# Allegro board 8880F5-0822_6.brd
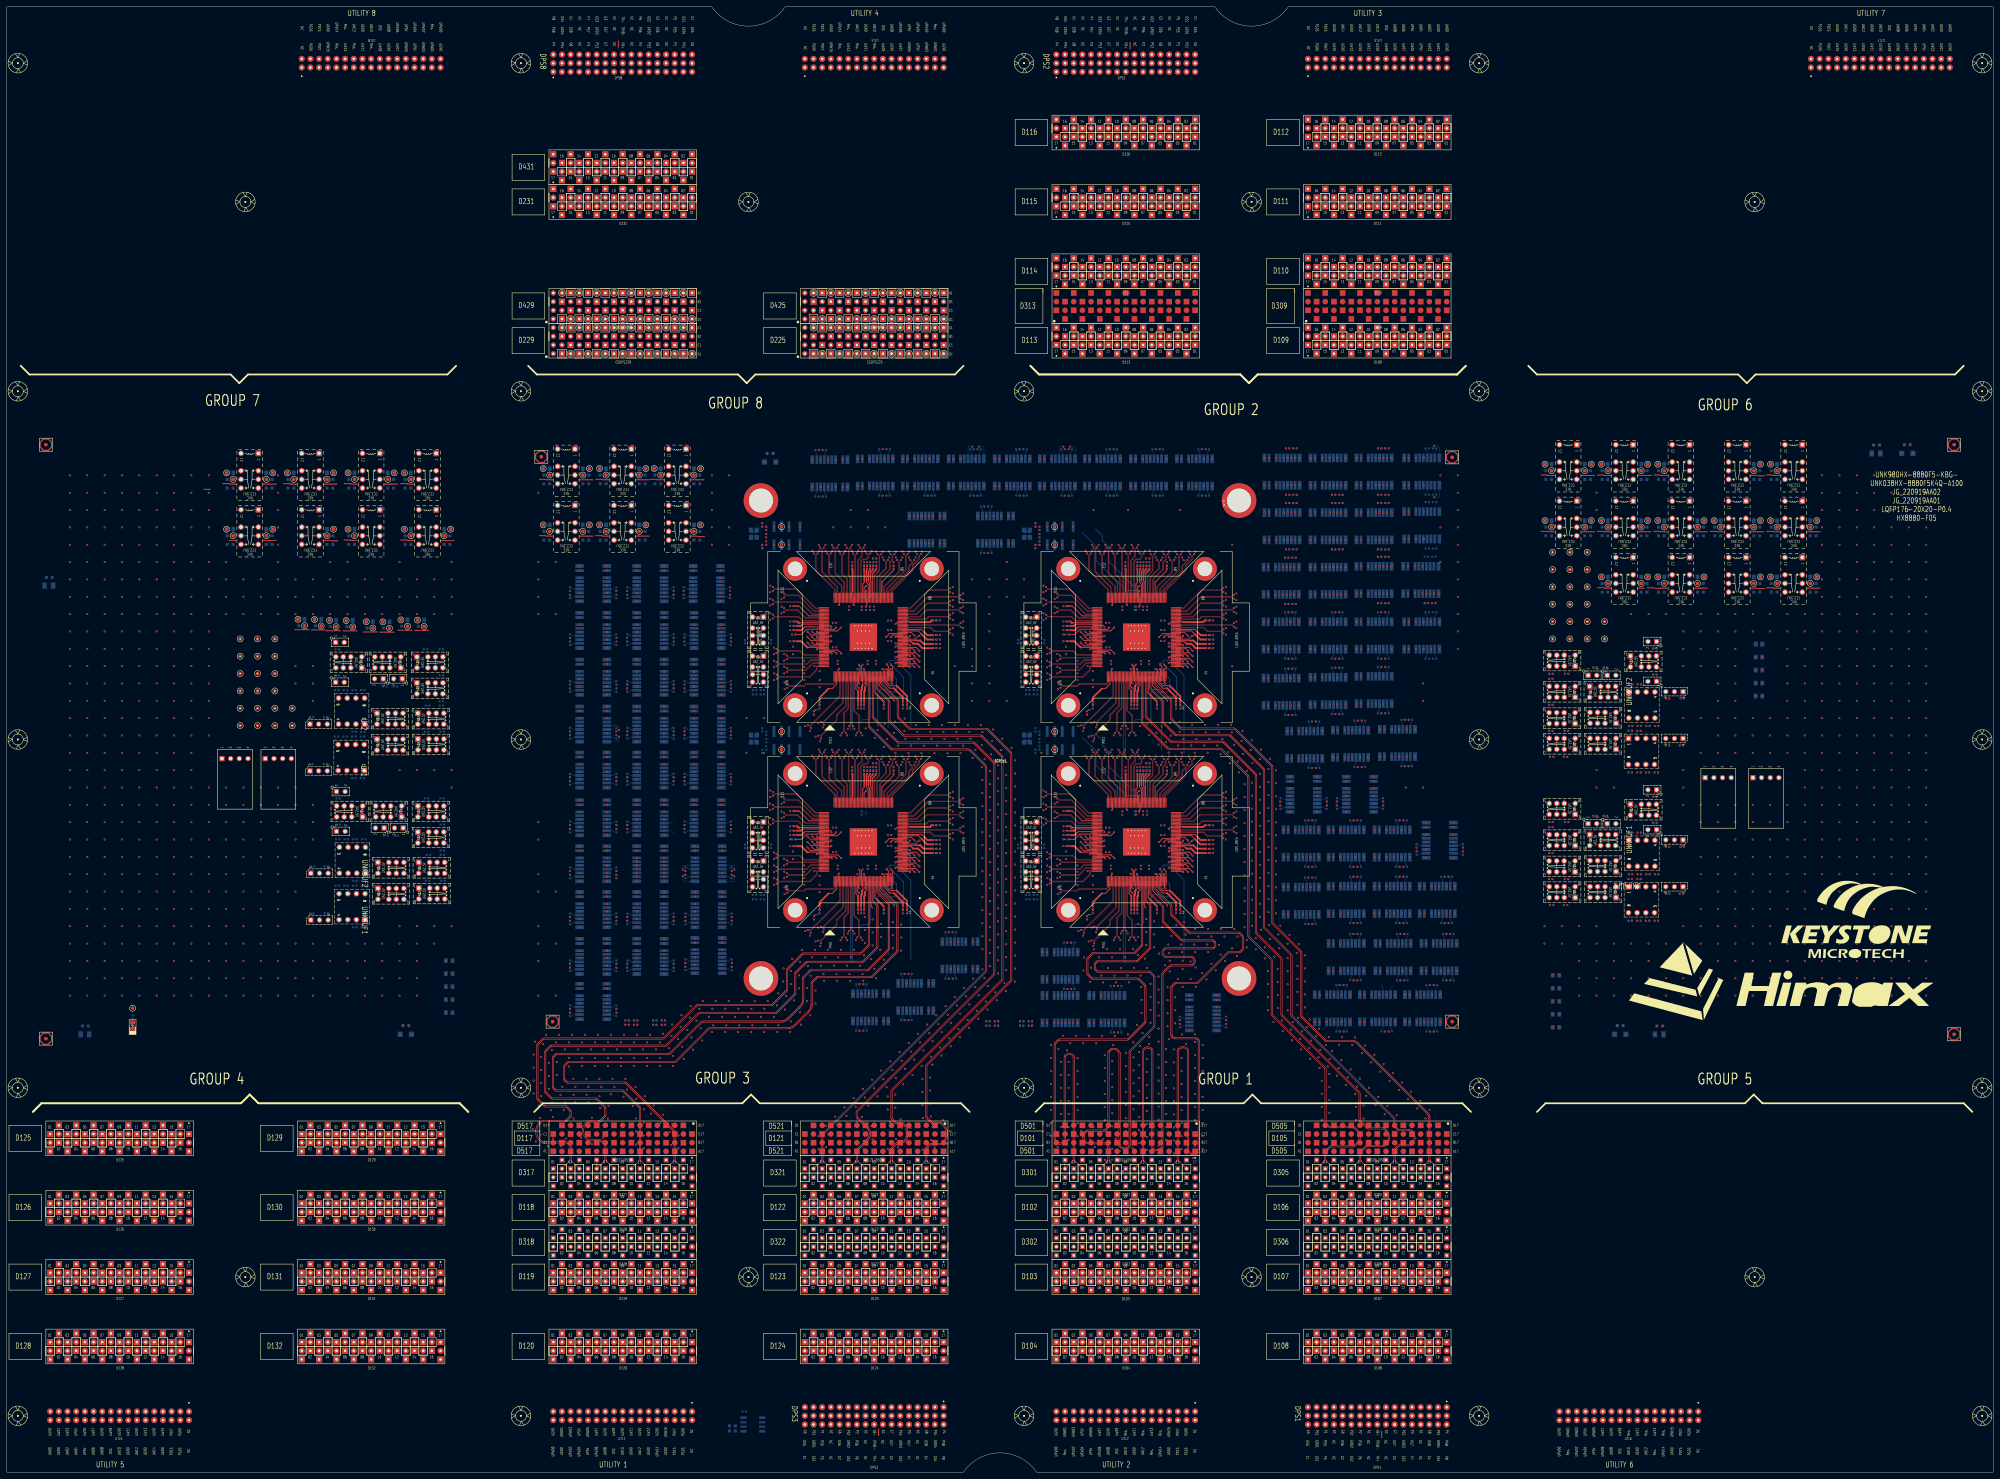
[diagram p0: board, top side]
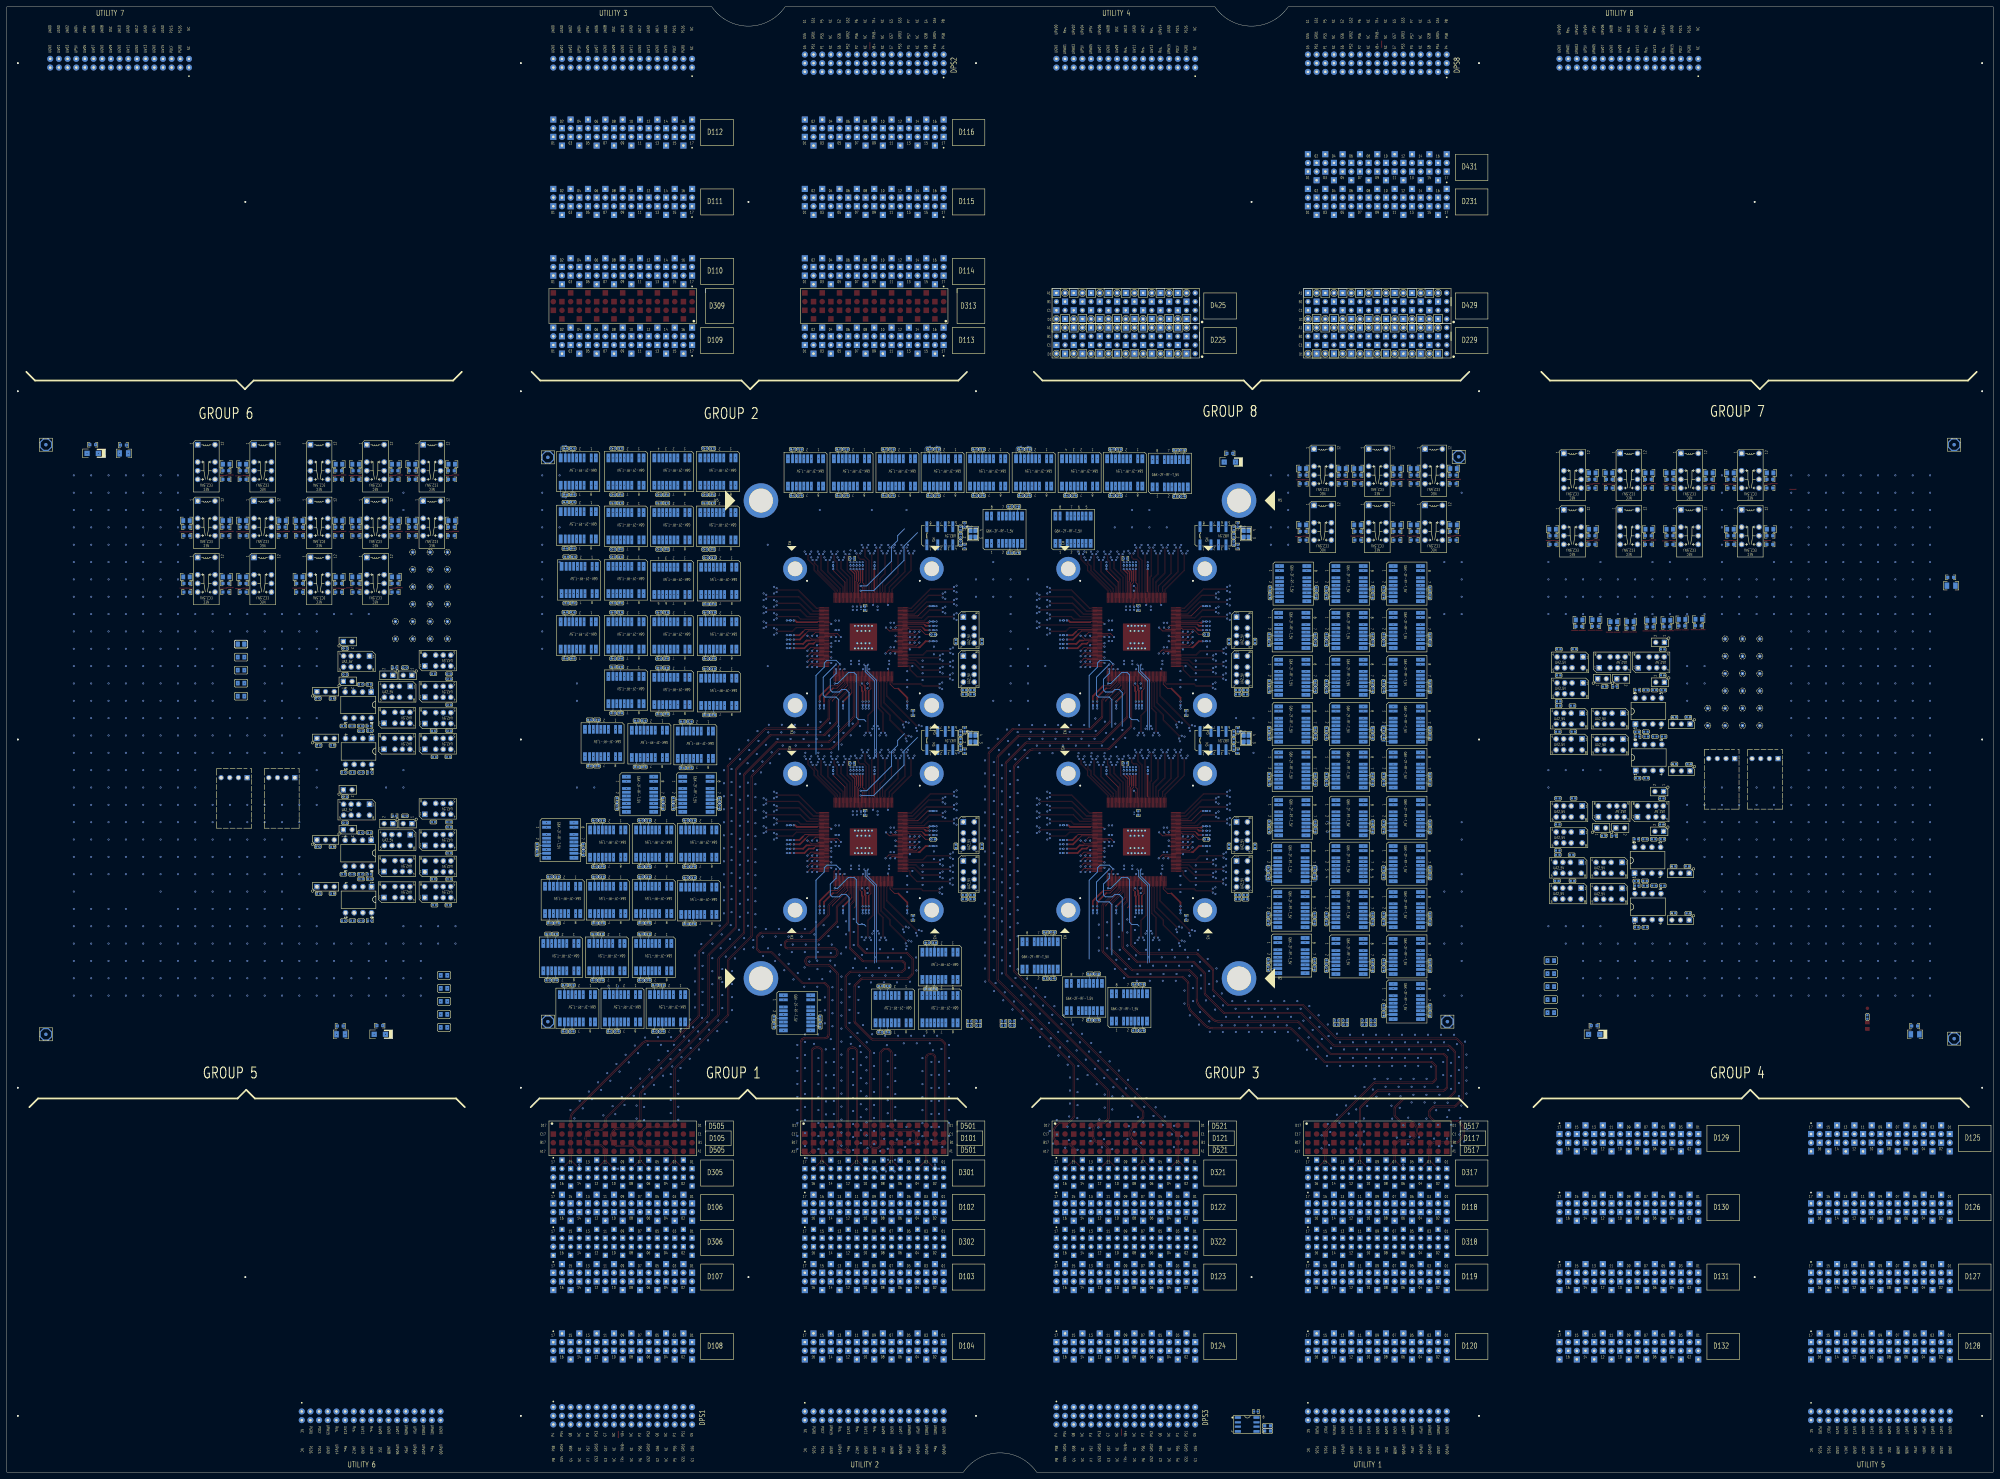
[diagram p1: board, bottom side, seen from below]

Outline 581.66 x 429.26 mm; copper layers: TOP, L02_DGND, L03_SIGNAL, L04_DGND, L05_SIGNAL, L06_DGND, L07_SIGNAL, L08_DGND, L09_SIGNAL, L10_DGND, L11_POWER, L12_DGND, L13_POWER, L14_DGND, L15_POWER, L16_DGND, L17_5V, L18_CBIT, L19_DGND, L20_POWER, L21_DGND, L22_POWER, L23_DGND, L24_POWER, L25_DGND, L26_SIGNAL, L27_DGND, L28_SIGNAL, L29_DGND, L30_SIGNAL, L31_DGND, L32_SIGNAL, L33_DGND, BOTTOM. Coordinates in mm from the lower left corner of the outline.

## Design rules (mm)
net group DIFFPAIR0: nets S1_2TX_100DCH007+ S1_2TX_100DCH007-
net group DIFFPAIR1: nets S1_2TX_100DCH006+ S1_2TX_100DCH006-
net group DIFFPAIR2: nets S1_2TX_100DCH005+ S1_2TX_100DCH005-
net group DIFFPAIR3: nets S1_2TX_100DCH004+ S1_2TX_100DCH004-
net group DIFFPAIR4: nets S1_2TX_100DCH003+ S1_2TX_100DCH003-
net group DIFFPAIR5: nets S1_2TX_100DCH002+ S1_2TX_100DCH002-
net group DIFFPAIR6: nets S1_2TX_100DCH001+ S1_2TX_100DCH001-
net group DIFFPAIR71: nets S1_4TX_100DCH003+ S1_4TX_100DCH003-
net group DIFFPAIR72: nets S1_4TX_100DCH004+ S1_4TX_100DCH004-
net group DIFFPAIR73: nets S1_4TX_100DCH005+ S1_4TX_100DCH005-
net group DIFFPAIR74: nets S1_4TX_100DCH006+ S1_4TX_100DCH006-
net group DIFFPAIR75: nets S1_4TX_100DCH007+ S1_4TX_100DCH007-
net group DIFFPAIR76: nets S1_ISP14+ S1_ISP14-
net group DIFFPAIR77: nets S1_3TX_100DCH002+ S1_3TX_100DCH002-
net group DIFFPAIR78: nets S1_3TX_100DCH003+ S1_3TX_100DCH003-
net group DIFFPAIR79: nets S1_3TX_100DCH004+ S1_3TX_100DCH004-
net group DIFFPAIR80: nets S1_3TX_100DCH005+ S1_3TX_100DCH005-
net group DIFFPAIR81: nets S1_3TX_100DCH006+ S1_3TX_100DCH006-
net group DIFFPAIR82: nets S1_3TX_100DCH007+ S1_3TX_100DCH007-
net group DIFFPAIR83: nets S1_4TX_100DCH001+ S1_4TX_100DCH001-
net group DIFFPAIR84: nets S1_4TX_100DCH002+ S1_4TX_100DCH002-
net group DIFFPAIR85: nets S1_1TX_100DCH007+ S1_1TX_100DCH007-
net group DIFFPAIR86: nets S1_1TX_100DCH006+ S1_1TX_100DCH006-
net group DIFFPAIR87: nets S1_1TX_100DCH005+ S1_1TX_100DCH005-
net group DIFFPAIR88: nets S1_1TX_100DCH004+ S1_1TX_100DCH004-
net group DIFFPAIR89: nets S1_1TX_100DCH003+ S1_1TX_100DCH003-
net group DIFFPAIR90: nets S1_1TX_100DCH002+ S1_1TX_100DCH002-
net group DIFFPAIR91: nets S1_ISP00+ S1_ISP00-
net group DIFFPAIR92: nets S2_4TX_100DCH003+ S2_4TX_100DCH003-
net group DIFFPAIR93: nets S2_4TX_100DCH004+ S2_4TX_100DCH004-
net group DIFFPAIR94: nets S2_4TX_100DCH005+ S2_4TX_100DCH005-
net group DIFFPAIR95: nets S2_4TX_100DCH006+ S2_4TX_100DCH006-
net group DIFFPAIR96: nets S2_4TX_100DCH007+ S2_4TX_100DCH007-
net group DIFFPAIR97: nets S2_4TX_100DCH002+ S2_4TX_100DCH002-
net group DIFFPAIR98: nets S2_4TX_100DCH001+ S2_4TX_100DCH001-
net group DIFFPAIR99: nets S2_3TX_100DCH007+ S2_3TX_100DCH007-
net group DIFFPAIR100: nets S2_3TX_100DCH006+ S2_3TX_100DCH006-
net group DIFFPAIR101: nets S2_3TX_100DCH005+ S2_3TX_100DCH005-
net group DIFFPAIR102: nets S2_3TX_100DCH004+ S2_3TX_100DCH004-
net group DIFFPAIR103: nets S2_3TX_100DCH003+ S2_3TX_100DCH003-
net group DIFFPAIR104: nets S2_3TX_100DCH002+ S2_3TX_100DCH002-
net group DIFFPAIR105: nets S2_ISP14+ S2_ISP14-
net group DIFFPAIR106: nets S2_2TX_100DCH007+ S2_2TX_100DCH007-
net group DIFFPAIR107: nets S2_2TX_100DCH006+ S2_2TX_100DCH006-
net group DIFFPAIR108: nets S2_2TX_100DCH005+ S2_2TX_100DCH005-
net group DIFFPAIR109: nets S2_2TX_100DCH004+ S2_2TX_100DCH004-
net group DIFFPAIR110: nets S2_2TX_100DCH003+ S2_2TX_100DCH003-
net group DIFFPAIR111: nets S2_2TX_100DCH002+ S2_2TX_100DCH002-
net group DIFFPAIR112: nets S2_2TX_100DCH001+ S2_2TX_100DCH001-
net group DIFFPAIR113: nets S2_1TX_100DCH007+ S2_1TX_100DCH007-
net group DIFFPAIR114: nets S2_1TX_100DCH006+ S2_1TX_100DCH006-
net group DIFFPAIR115: nets S2_1TX_100DCH005+ S2_1TX_100DCH005-
net group DIFFPAIR116: nets S2_1TX_100DCH004+ S2_1TX_100DCH004-
net group DIFFPAIR117: nets S2_1TX_100DCH003+ S2_1TX_100DCH003-
net group DIFFPAIR118: nets S2_1TX_100DCH002+ S2_1TX_100DCH002-
net group DIFFPAIR119: nets S2_ISP00+ S2_ISP00-
net group DIFFPAIR120: nets S4_4TX_100DCH007+ S4_4TX_100DCH007-
net group DIFFPAIR121: nets S4_4TX_100DCH006+ S4_4TX_100DCH006-
net group DIFFPAIR122: nets S4_4TX_100DCH005+ S4_4TX_100DCH005-
net group DIFFPAIR123: nets S4_4TX_100DCH004+ S4_4TX_100DCH004-
net group DIFFPAIR124: nets S4_4TX_100DCH003+ S4_4TX_100DCH003-
net group DIFFPAIR125: nets S4_4TX_100DCH002+ S4_4TX_100DCH002-
net group DIFFPAIR126: nets S4_4TX_100DCH001+ S4_4TX_100DCH001-
net group DIFFPAIR127: nets S4_3TX_100DCH007+ S4_3TX_100DCH007-
net group DIFFPAIR128: nets S4_3TX_100DCH006+ S4_3TX_100DCH006-
net group DIFFPAIR129: nets S4_3TX_100DCH005+ S4_3TX_100DCH005-
net group DIFFPAIR130: nets S4_3TX_100DCH004+ S4_3TX_100DCH004-
net group DIFFPAIR131: nets S4_3TX_100DCH003+ S4_3TX_100DCH003-
net group DIFFPAIR132: nets S4_3TX_100DCH002+ S4_3TX_100DCH002-
net group DIFFPAIR133: nets S4_ISP14+ S4_ISP14-
net group DIFFPAIR134: nets S4_2TX_100DCH007+ S4_2TX_100DCH007-
net group DIFFPAIR135: nets S4_2TX_100DCH006+ S4_2TX_100DCH006-
net group DIFFPAIR136: nets S4_2TX_100DCH005+ S4_2TX_100DCH005-
net group DIFFPAIR137: nets S4_2TX_100DCH004+ S4_2TX_100DCH004-
net group DIFFPAIR138: nets S4_2TX_100DCH003+ S4_2TX_100DCH003-
net group DIFFPAIR139: nets S4_2TX_100DCH002+ S4_2TX_100DCH002-
net group DIFFPAIR140: nets S4_2TX_100DCH001+ S4_2TX_100DCH001-
net group DIFFPAIR141: nets S4_1TX_100DCH007+ S4_1TX_100DCH007-
net group DIFFPAIR142: nets S4_1TX_100DCH006+ S4_1TX_100DCH006-
net group DIFFPAIR143: nets S4_1TX_100DCH005+ S4_1TX_100DCH005-
net group DIFFPAIR144: nets S4_1TX_100DCH004+ S4_1TX_100DCH004-
net group DIFFPAIR145: nets S4_1TX_100DCH003+ S4_1TX_100DCH003-
net group DIFFPAIR146: nets S4_1TX_100DCH002+ S4_1TX_100DCH002-
net group DIFFPAIR147: nets S4_ISP00+ S4_ISP00-
net group DIFFPAIR148: nets S3_4TX_100DCH007+ S3_4TX_100DCH007-
net group DIFFPAIR149: nets S3_4TX_100DCH006+ S3_4TX_100DCH006-
net group DIFFPAIR150: nets S3_4TX_100DCH005+ S3_4TX_100DCH005-
net group DIFFPAIR151: nets S3_4TX_100DCH004+ S3_4TX_100DCH004-
net group DIFFPAIR152: nets S3_4TX_100DCH003+ S3_4TX_100DCH003-
net group DIFFPAIR153: nets S3_4TX_100DCH002+ S3_4TX_100DCH002-
net group DIFFPAIR154: nets S3_4TX_100DCH001+ S3_4TX_100DCH001-
net group DIFFPAIR155: nets S3_3TX_100DCH007+ S3_3TX_100DCH007-
net group DIFFPAIR156: nets S3_3TX_100DCH006+ S3_3TX_100DCH006-
net group DIFFPAIR157: nets S3_3TX_100DCH005+ S3_3TX_100DCH005-
net group DIFFPAIR158: nets S3_3TX_100DCH004+ S3_3TX_100DCH004-
net group DIFFPAIR159: nets S3_3TX_100DCH003+ S3_3TX_100DCH003-
net group DIFFPAIR160: nets S3_3TX_100DCH002+ S3_3TX_100DCH002-
net group DIFFPAIR161: nets S3_ISP14+ S3_ISP14-
net group DIFFPAIR162: nets S3_2TX_100DCH007+ S3_2TX_100DCH007-
net group DIFFPAIR163: nets S3_2TX_100DCH006+ S3_2TX_100DCH006-
net group DIFFPAIR164: nets S3_2TX_100DCH005+ S3_2TX_100DCH005-
net group DIFFPAIR165: nets S3_2TX_100DCH004+ S3_2TX_100DCH004-
net group DIFFPAIR166: nets S3_2TX_100DCH003+ S3_2TX_100DCH003-
net group DIFFPAIR167: nets S3_2TX_100DCH002+ S3_2TX_100DCH002-
net group DIFFPAIR168: nets S3_2TX_100DCH001+ S3_2TX_100DCH001-
net group DIFFPAIR169: nets S3_1TX_100DCH007+ S3_1TX_100DCH007-
net group DIFFPAIR170: nets S3_1TX_100DCH006+ S3_1TX_100DCH006-
net group DIFFPAIR171: nets S3_1TX_100DCH005+ S3_1TX_100DCH005-
net group DIFFPAIR172: nets S3_1TX_100DCH004+ S3_1TX_100DCH004-
net group DIFFPAIR173: nets S3_1TX_100DCH003+ S3_1TX_100DCH003-
net group DIFFPAIR174: nets S3_1TX_100DCH002+ S3_1TX_100DCH002-
net group DIFFPAIR175: nets S3_ISP00+ S3_ISP00-
net group DIFFPAIR176: nets S1_1TX_100DCH001+ S1_1TX_100DCH001-
net group DIFFPAIR177: nets S3_1TX_100DCH001+ S3_1TX_100DCH001-
net group DIFFPAIR178: nets S4_1TX_100DCH001+ S4_1TX_100DCH001-
net group DIFFPAIR179: nets S2_1TX_100DCH001+ S2_1TX_100DCH001-

## Placement (name value [footprint] x y rotation side)
BD29  BD120-3A-S8  [FB0805]  129.54 134.62 180 bottom
BD30  BD120-3A-S8  [FB0805]  129.54 146.05 180 bottom
BD31  BD120-3A-S8  [FB0805]  129.54 142.24 0 bottom
BD32  BD120-3A-S8  [FB0805]  513.08 238.76 180 bottom
BD33  BD120-3A-S8  [FB0805]  513.08 242.57 180 bottom
BD34  BD120-3A-S8  [FB0805]  453.64 145.54 0 bottom
BD35  BD120-3A-S8  [FB0805]  453.64 137.92 180 bottom
BD36  BD120-3A-S8  [FB0805]  129.54 138.43 180 bottom
BD37  BD120-3A-S8  [FB0805]  453.64 130.3 180 bottom
BD38  BD120-3A-S8  [FB0805]  513.08 242.57 180 bottom
BD39  BD120-3A-S8  [FB0805]  453.64 141.73 0 bottom
BD40  BD120-3A-S8  [FB0805]  453.64 134.11 180 bottom
BD41  BD120-3A-S8  [FB0805]  513.08 234.95 180 bottom
BD42  BD120-3A-S8  [FB0805]  513.08 231.14 180 bottom
BD43  BD120-3A-S8  [FB0805]  513.08 227.33 180 bottom
BD44  BD120-3A-S8  [FB0805]  129.54 149.86 180 bottom
BR902  330-1-S4  [R0402]  36.83 133.35 270 bottom
C3  0.1U-16-X-S4-MU  [C0402]  184.15 132.33 180 bottom
C4  0.1U-16-X-S4-MU  [C0402]  181.61 132.33 180 bottom
C5  22P-50-N-S4-AVX  [C0402]  221.21 277.48 90 bottom
C6  22P-50-N-S4-AVX  [C0402]  221.21 271.16 270 bottom
C7  0.1U-16-X-S4-MU  [C0402]  110.74 230.12 0 bottom
C8  0.1U-16-X-S4-MU  [C0402]  104.14 215.5 180 bottom
C9  0.1U-16-X-S4-MU  [C0402]  104.24 229.1 180 bottom
CA1  NC/10U-10-X6S-S6-MU  [C0603]  186.05 292.1 0 bottom
CA2  NC/47U-10-X5R-S8-TDK  [C0805]  186.16 294 0 bottom
CA3  NC/10U-10-X6S-S6-MU  [C0603]  174.62 292.1 180 bottom
CA4  NC/47U-10-X5R-S8-TDK  [C0805]  174.52 294 180 bottom
CA5  NC/10U-10-X6S-S6-MU  [C0603]  117.47 290.83 180 bottom
CA6  NC/47U-10-X5R-S8-TDK  [C0805]  117.37 292.74 180 bottom
CA7  NC/10U-10-X6S-S6-MU  [C0603]  169.54 292.1 0 bottom
CA8  NC/47U-10-X5R-S8-TDK  [C0805]  169.65 294 0 bottom
CA9  NC/10U-10-X6S-S6-MU  [C0603]  158.11 292.1 180 bottom
CA10  NC/47U-10-X5R-S8-TDK  [C0805]  158.01 294 180 bottom
CA11  NC/10U-10-X6S-S6-MU  [C0603]  186.05 275.59 0 bottom
CA12  NC/47U-10-X5R-S8-TDK  [C0805]  186.16 277.5 0 bottom
CA13  NC/47U-10-X5R-S8-TDK  [C0805]  202.16 294 0 bottom
CA14  NC/10U-10-X6S-S6-MU  [C0603]  202.06 292.1 0 bottom
CA15  NC/47U-10-X5R-S8-TDK  [C0805]  190.53 294 180 bottom
CA16  NC/10U-10-X6S-S6-MU  [C0603]  190.63 292.1 180 bottom
CA17  NC/47U-10-X5R-S8-TDK  [C0805]  169.65 277.5 0 bottom
CA18  NC/10U-10-X6S-S6-MU  [C0603]  169.54 275.59 0 bottom
CA19  NC/47U-10-X5R-S8-TDK  [C0805]  100.34 249.52 180 bottom
CA20  NC/10U-10-X6S-S6-MU  [C0603]  100.44 247.61 180 bottom
CA21  10U-10-X6S-S6-MU  [C0603]  186.05 289.56 0 bottom
CA22  10U-10-X6S-S6-MU  [C0603]  174.62 289.56 180 bottom
CA23  10U-10-X6S-S6-MU  [C0603]  117.47 288.29 180 bottom
CA24  10U-10-X6S-S6-MU  [C0603]  169.54 289.56 0 bottom
CA25  10U-10-X6S-S6-MU  [C0603]  158.11 289.56 180 bottom
CA26  10U-10-X6S-S6-MU  [C0603]  186.05 273.05 0 bottom
CA27  10U-10-X6S-S6-MU  [C0603]  202.06 289.56 0 bottom
CA28  10U-10-X6S-S6-MU  [C0603]  190.63 289.56 180 bottom
CA29  10U-10-X6S-S6-MU  [C0603]  169.54 273.05 0 bottom
CA30  NC/47U-10-X5R-S8-TDK  [C0805]  95.47 249.57 180 bottom
CA31  10U-10-X6S-S6-MU  [C0603]  95.57 247.66 180 bottom
CA32  NC/10U-10-X6S-S6-MU  [C0603]  202.06 275.59 0 bottom
CA33  NC/47U-10-X5R-S8-TDK  [C0805]  202.16 277.5 0 bottom
CA34  10U-10-X6S-S6-MU  [C0603]  202.06 273.05 0 bottom
CA35  NC/10U-10-X6S-S6-MU  [C0603]  174.62 275.59 180 bottom
CA36  NC/47U-10-X5R-S8-TDK  [C0805]  174.52 277.5 180 bottom
CA37  10U-10-X6S-S6-MU  [C0603]  174.62 273.05 180 bottom
CA38  NC/10U-10-X6S-S6-MU  [C0603]  158.11 275.59 180 bottom
CA39  NC/47U-10-X5R-S8-TDK  [C0805]  158.01 277.5 180 bottom
CA40  10U-10-X6S-S6-MU  [C0603]  158.11 273.05 180 bottom
CB1  0.1U-25-X-S6  [C0603]  116.84 130.81 0 bottom
CB2  10U-16-T-SA  [CODE_A]  116.84 128.27 0 bottom
CB3  0.1U-25-X-S6  [C0603]  472.44 130.81 0 bottom
CB4  10U-16-T-SA  [CODE_A]  472.44 128.27 0 bottom
CB5  0.1U-25-X-S6  [C0603]  556.51 300.99 0 bottom
CB6  10U-16-T-SA  [CODE_A]  556.51 298.45 0 bottom
CB7  0.1U-25-X-S6  [C0603]  223.52 298.45 0 bottom
CB8  10U-16-T-SA  [CODE_A]  223.52 295.91 0 bottom
CB9  0.1U-25-X-S6  [C0603]  23.01 130.71 0 bottom
CB10  10U-25-X7R-SA  [C1206]  22.86 128.27 0 bottom
CB11  0.1U-25-X-S6  [C0603]  484.02 130.71 0 bottom
CB12  10U-25-X7R-SA  [C1206]  483.87 128.27 0 bottom
CB13  0.1U-25-X-S6  [C0603]  547.52 300.89 0 bottom
CB14  10U-25-X7R-SA  [C1206]  547.37 298.45 0 bottom
CB15  0.1U-25-X-S6  [C0603]  12.45 262.13 0 bottom
CB16  10U-25-X7R-SA  [C1206]  12.3 259.69 0 bottom
CB19  0.1U-25-X7R-S4-MU  [C0402]  215.9 17.78 180 bottom
CC1  0.47U-10-X6S-S2-TY  [C0201]  237.98 224.12 90 bottom
CC2  4.7U-10-X6T-S4-MU  [C0402]  236.32 222.4 270 bottom
CC4  0.47U-10-X6S-S2-TY  [C0201]  229.81 247.93 0 bottom
CC6  0.47U-10-X6S-S2-TY  [C0201]  250.17 224.12 90 bottom
CC7  0.47U-10-X6S-S2-TY  [C0201]  229.81 246.66 0 bottom
CC8  0.47U-10-X6S-S2-TY  [C0201]  263.63 224.12 90 bottom
CC9  0.47U-10-X6S-S2-TY  [C0201]  254.61 266.16 270 bottom
CC11  0.47U-10-X6S-S2-TY  [C0201]  251.06 224.12 90 bottom
CC13  0.47U-10-X6S-S2-TY  [C0201]  256.77 224.12 90 bottom
CC15  4.7U-2.5-X6S-S2-MU  [C0201]  259.65 264.95 90 bottom
CC16  NC/4.7U-2.5-X6S-S2-MU  [C0201]  271.64 249.5 0 bottom
CC17  4.7U-2.5-X6S-S2-MU  [C0201]  229.81 253.69 0 bottom
CC19  0.47U-10-X6S-S2-TY  [C0201]  252.83 266.16 270 bottom
CC20  4.7U-10-X6T-S4-MU  [C0402]  254.11 267.66 0 bottom
CC22  0.47U-10-X6S-S2-TY  [C0201]  251.05 266.16 270 bottom
CC23  4.7U-10-X6T-S4-MU  [C0402]  250.34 253.09 270 bottom
CC25  0.47U-10-X6S-S2-TY  [C0201]  272.85 245.18 180 bottom
CC26  0.47U-10-X6S-S2-TY  [C0201]  253.72 266.16 270 bottom
CC27  0.47U-10-X6S-S2-TY  [C0201]  272.85 249.5 180 bottom
CC28  0.47U-10-X6S-S2-TY  [C0201]  259.65 266.16 270 bottom
CC29  0.47U-10-X6S-S2-TY  [C0201]  231.03 253.69 180 bottom
CC30  0.47U-10-X6S-S2-TY  [C0201]  229.81 243.41 0 bottom
CC31  0.47U-10-X6S-S2-TY  [C0201]  249.28 224.12 90 bottom
CC32  0.47U-10-X6S-S2-TY  [C0201]  262.36 224.12 90 bottom
CC33  0.47U-10-X6S-S2-TY  [C0201]  272.85 243.91 180 bottom
CC34  0.47U-10-X6S-S2-TY  [C0201]  251.94 266.16 270 bottom
CC35  0.47U-10-X6S-S2-TY  [C0201]  272.85 241.37 180 bottom
CC36  0.47U-10-X6S-S2-TY  [C0201]  272.85 242.64 180 bottom
CC37  0.47U-10-X6S-S2-TY  [C0201]  247.57 264.95 90 bottom
CC38  NC/4.7U-2.5-X6S-S2-MU  [C0201]  247.57 266.16 270 bottom
CC39  0.47U-10-X6S-S2-TY  [C0201]  231.03 249.2 180 bottom
CC40  4.7U-2.5-X6S-S2-MU  [C0201]  258.5 246.67 180 bottom
CC41  4.7U-2.5-X6S-S2-MU  [C0201]  229.81 249.2 0 bottom
CC42  4.7U-2.5-X6S-S2-MU  [C0201]  251.54 253.03 90 bottom
CD1  0.1U-10-X7R-S2-MU  [C0201]  237.98 225.34 270 top
CD3  0.1U-10-X7R-S2-MU  [C0201]  271.64 241.37 0 top
CD4  0.1U-10-X7R-S2-MU  [C0201]  254.61 264.95 90 top
CD5  0.1U-10-X7R-S2-MU  [C0201]  263.63 225.34 270 top
CD6  0.1U-10-X7R-S2-MU  [C0201]  231.03 246.66 180 top
CD7  0.1U-10-X7R-S2-MU  [C0201]  271.64 242.64 0 top
CD8  0.1U-10-X7R-S2-MU  [C0201]  251.06 225.34 270 top
CD9  0.1U-10-X7R-S2-MU  [C0201]  256.77 225.34 270 top
CD10  0.1U-10-X7R-S2-MU  [C0201]  271.64 249.5 0 top
CD11  0.1U-10-X7R-S2-MU  [C0201]  259.65 264.95 90 top
CD12  0.1U-10-X7R-S2-MU  [C0201]  231.03 253.69 180 top
CD13  0.1U-10-X7R-S2-MU  [C0201]  252.83 264.95 90 top
CD14  0.1U-10-X7R-S2-MU  [C0201]  251.05 264.95 90 top
CD15  0.1U-10-X7R-S2-MU  [C0201]  271.64 245.18 0 top
CD16  0.1U-10-X7R-S2-MU  [C0201]  253.72 264.95 90 top
CD17  0.1U-10-X7R-S2-MU  [C0201]  231.03 247.93 180 top
CD18  0.1U-10-X7R-S2-MU  [C0201]  251.94 264.95 90 top
CD19  0.1U-10-X7R-S2-MU  [C0201]  231.03 243.41 180 top
CD20  0.1U-10-X7R-S2-MU  [C0201]  271.64 243.91 0 top
CD21  0.1U-10-X7R-S2-MU  [C0201]  262.36 225.34 270 top
CD22  0.1U-10-X7R-S2-MU  [C0201]  249.28 225.34 270 top
CD23  0.1U-10-X7R-S2-MU  [C0201]  250.17 225.34 270 top
CD24  0.1U-10-X7R-S2-MU  [C0201]  247.57 264.95 90 top
CD25  0.1U-10-X7R-S2-MU  [C0201]  231.03 249.2 180 top
CSDPS225  V93K_CSDPS_DPS32  [PG_VG93K_PF_DPS32_G8D225]  254 331.47 0 top
CSDPS229  V93K_CSDPS_DPS32  [PG_VG93K_PF_DPS32_G8D229]  180.34 331.47 0 top
CSDPS425  V93K_CSDPS_DPS32  [PG_VG93K_PF_DPS32_G8D425]  254 341.63 0 top
CSDPS429  V93K_CSDPS_DPS32  [PG_VG93K_PF_DPS32_G8D429]  180.34 341.63 0 top
D101/D501  V93K_PS1600 HD  [PG_VG93K_F_HSM_G1D101_501_ND]  327.66 97.79 0 top
D102  V93K_CH  [PG_VG93K_F_G1D102]  327.66 77.47 0 top
D103  V93K_CH  [PG_VG93K_F_G1D103]  327.66 57.15 0 top
D104  V93K_CH  [PG_VG93K_F_G1D104]  327.66 36.83 0 top
D105/D505  V93K_PS1600 HD  [PG_VG93K_F_HSM_G1D105_505_ND]  401.32 97.79 0 top
D106  V93K_CH  [PG_VG93K_F_G1D106]  401.32 77.47 0 top
D107  V93K_CH  [PG_VG93K_F_G1D107]  401.32 57.15 0 top
D108  V93K_CH  [PG_VG93K_F_G1D108]  401.32 36.83 0 top
D109  V93K_CH  [PG_VG93K_F_G2D109]  401.32 331.47 0 top
D110  V93K_CH  [PG_VG93K_F_G2D110]  401.32 351.79 0 top
D111  V93K_CH  [PG_VG93K_F_G2D111]  401.32 372.11 0 top
D112  V93K_CH  [PG_VG93K_F_G2D112]  401.32 392.43 0 top
D113  V93K_CH  [PG_VG93K_F_G2D113]  327.66 331.47 0 top
D114  V93K_CH  [PG_VG93K_F_G2D114]  327.66 351.79 0 top
D115  V93K_CH  [PG_VG93K_F_G2D115]  327.66 372.11 0 top
D116  V93K_CH  [PG_VG93K_F_G2D116]  327.66 392.43 0 top
D117/D517  V93K_PS1600 HD  [PG_VG93K_F_HSM_G3D117_517_ND]  180.34 97.79 0 top
D118  V93K_CH  [PG_VG93K_F_G3D118]  180.34 77.47 0 top
D119  V93K_CH  [PG_VG93K_F_G3D119]  180.34 57.15 0 top
D120  V93K_CH  [PG_VG93K_F_G3D120]  180.34 36.83 0 top
D121/D521  V93K_PS1600 HD  [PG_VG93K_F_HSM_G3D121_521_ND]  254 97.79 0 top
D122  V93K_CH  [PG_VG93K_F_G3D122]  254 77.47 0 top
D123  V93K_CH  [PG_VG93K_F_G3D123]  254 57.15 0 top
D124  V93K_CH  [PG_VG93K_F_G3D124]  254 36.83 0 top
D125  V93K_CH  [PG_VG93K_F_G4D125]  33.02 97.79 0 top
D126  V93K_CH  [PG_VG93K_F_G4D126]  33.02 77.47 0 top
D127  V93K_CH  [PG_VG93K_F_G4D127]  33.02 57.15 0 top
D128  V93K_CH  [PG_VG93K_F_G4D128]  33.02 36.83 0 top
D129  V93K_CH  [PG_VG93K_F_G4D129]  106.68 97.79 0 top
D130  V93K_CH  [PG_VG93K_F_G4D130]  106.68 77.47 0 top
D131  V93K_CH  [PG_VG93K_F_G4D131]  106.68 57.15 0 top
D132  V93K_CH  [PG_VG93K_F_G4D132]  106.68 36.83 0 top
D231  V93K_CH  [PG_VG93K_F_G8D231]  180.34 372.11 0 top
D301  V93K_CH  [PG_VG93K_F_G1D301]  327.66 87.63 0 top
D302  V93K_CH  [PG_VG93K_F_G1D302]  327.66 67.31 0 top
D305  V93K_CH  [PG_VG93K_F_G1D305]  401.32 87.63 0 top
D306  V93K_CH  [PG_VG93K_F_G1D306]  401.32 67.31 0 top
D309  V93K_PSSL  [PG_VG93K_F_PSSL_G2D309_ND]  401.32 341.63 0 top
D313  V93K_PSSL  [PG_VG93K_F_PSSL_G2D313_ND]  327.66 341.63 0 top
D317  V93K_CH  [PG_VG93K_F_G3D317]  180.34 87.63 0 top
D318  V93K_CH  [PG_VG93K_F_G3D318]  180.34 67.31 0 top
D321  V93K_CH  [PG_VG93K_F_G3D321]  254 87.63 0 top
D322  V93K_CH  [PG_VG93K_F_G3D322]  254 67.31 0 top
D431  V93K_CH  [PG_VG93K_F_G8D431]  180.34 382.27 0 top
DPS1  V93K_DPS  [PG_VG93K_F_G1DPS1]  401.32 16.51 0 top
DPS2  V93K_DPS  [PG_VG93K_F_G2DPS2]  327.66 412.75 0 top
DPS3  V93K_DPS  [PG_VG93K_F_G3DPS3]  254 16.51 0 top
DPS8  V93K_DPS  [PG_VG93K_F_G8DPS8]  180.34 412.75 0 top
FD1  -  [FD_040_V2]  159.82 131.98 0 top
FD2  -  [FD_040_V2]  423.24 131.98 0 top
FD3  -  [FD_040_V2]  423.24 297.28 0 top
FD4  -  [FD_040_V2]  156.51 297.46 0 top
FD5  -  [FD_040_V2]  159.82 131.98 180 bottom
FD6  -  [FD_040_V2]  423.24 131.98 180 bottom
FD7  -  [FD_040_V2]  423.24 297.28 180 bottom
FD8  -  [FD_040_V2]  156.51 297.46 180 bottom
FD9  -  [FD_040_V2]  570.23 128.27 180 bottom
FD10  -  [FD_040_V2]  570.23 300.99 0 top
FD11  -  [FD_040_V2]  570.23 300.99 180 bottom
FD12  -  [FD_040_V2]  11.43 300.99 0 top
FD13  -  [FD_040_V2]  11.43 300.99 180 bottom
FD14  -  [FD_040_V2]  11.43 127 0 top
FD15  -  [FD_040_V2]  11.43 127 180 bottom
FD16  -  [FD_040_V2]  570.23 128.27 0 top
GND1  TP01  [TP_040_T]  173.57 294 0 top
GND2  TP01  [TP_040_T]  187.11 294 180 top
GND3  TP01  [TP_040_T]  116.42 292.74 0 top
GND4  TP01  [TP_040_T]  157.06 294 0 top
GND5  TP01  [TP_040_T]  170.6 294 180 top
GND6  TP01  [TP_040_T]  173.57 277.5 0 top
GND7  TP01  [TP_040_T]  203.11 294 180 top
GND8  TP01  [TP_040_T]  189.58 294 0 top
GND9  TP01  [TP_040_T]  170.6 277.5 180 top
GND10  TP01  [TP_040_T]  99.36 249.46 0 top
GND11  TP01  [TP_040_T]  94.49 249.52 0 top
GND12  TP01  [TP_040_T]  203.11 277.5 180 top
GND13  TP01  [TP_040_T]  187.11 277.5 180 top
GND14  TP01  [TP_040_T]  157.06 277.5 0 top
HX8880-F05  REF-CODE-CHIP  [CHIP_CODE]  559.05 279.65 0 top
J1  HDR-2X1-M  [JP_2P_100]  110.24 232.41 270 bottom
J2  HDR-3X1-M  [JP_3P_100]  88.76 205.43 90 bottom
J3  HDR-3X1-M  [JP_3P_100]  88.76 219.15 90 bottom
J4  HDR-2X1-M  [JP_2P_100]  96.27 231.39 90 bottom
J5  HDR-2X1-M  [JP_2P_100]  96.27 243.08 90 bottom
JG_220919AA01  REF-CODE-SOCKET  [SOCKET_CODE]  559.05 284.73 0 top
JG_220919AA02  REF-CODE-SOCKET  [SOCKET_CODE]  559.05 287.27 0 top
K1  G6K-2F-RF-T-5V-SPECIAL  [RL_G6K2FRT_8P_5V_GR]  171.7 219.2 270 bottom
K2  G6K-2F-RF-T-5V-SPECIAL  [RL_G6K2FRT_8P_5V_GR]  205.23 232.92 270 bottom
K3  G6K-2F-RF-T-5V-SPECIAL  [RL_G6K2FRT_8P_5V_GR]  294.39 292.86 0 bottom
K4  G6K-2F-RF-T-5V-SPECIAL  [RL_G6K2FRT_8P_5V_GR]  307.59 292.86 0 bottom
K5  G6K-2F-RF-T-5V-SPECIAL  [RL_G6K2FRT_8P_5V_GR]  347.73 292.86 0 bottom
K6  G6K-2F-RF-T-5V-SPECIAL  [RL_G6K2FRT_8P_5V_GR]  334.26 292.86 0 bottom
K7  G6K-2F-RF-T-5V-SPECIAL  [RL_G6K2FRT_8P_5V_GR]  320.8 292.86 0 bottom
K8  G6K-2F-RF-T-5V-SPECIAL  [RL_G6K2FRT_8P_5V_GR]  267.46 292.86 0 bottom
K9  UA2-5NJ-A-V3  [RL_NECUA2_5V_V3]  219.96 235.46 90 bottom
K10  UA2-5NJ-A-V3  [RL_NECUA2_5V_V3]  111.76 237.24 0 bottom
K11  G6K-2F-RF-T-5V-SPECIAL  [RL_G6K2FRT_8P_5V_GR]  289.56 276.1 180 bottom
K12  UA2-5NJ-A-V3  [RL_NECUA2_5V_V3]  219.96 246.89 90 bottom
K13  UA2-5NJ-A-V3  [RL_NECUA2_5V_V3]  123.7 229.62 180 bottom
K14  UA2-5NJ-A-V3  [RL_NECUA2_5V_V3]  112.01 220.73 180 bottom
K15  UA2-5NJ-A-V3  [RL_NECUA2_5V_V3]  123.99 213.19 180 bottom
K16  G6K-2F-RF-T-5V-SPECIAL  [RL_G6K2FRT_8P_5V_GR]  241.05 292.61 180 bottom
K17  G6K-2F-RF-T-5V-SPECIAL  [RL_G6K2FRT_8P_5V_GR]  254.25 292.86 0 bottom
K18  UB2-5NU-B  [RL_NECUB2_5V]  228.45 274.32 0 bottom
K19  UA2-5NJ-A-V3  [RL_NECUA2_5V_V3]  112.01 213.11 180 bottom
K20  UA2-5NJ-A-V3  [RL_NECUA2_5V_V3]  123.95 220.73 180 bottom
K21  G6K-2F-RF-T-5V-SPECIAL  [RL_G6K2FRT_8P_5V_GR]  280.92 292.86 0 bottom
K22  G6K-2F-RF-T-5V-SPECIAL  [RL_G6K2FRT_8P_5V_GR]  205.23 246.63 270 bottom
K23  G6K-2F-RF-T-5V-SPECIAL  [RL_G6K2FRT_8P_5V_GR]  188.47 232.92 270 bottom
K24  G6K-2F-RF-T-5V-SPECIAL  [RL_G6K2FRT_8P_5V_GR]  171.7 232.92 270 bottom
K25  G6K-2F-RF-T-5V-SPECIAL  [RL_G6K2FRT_8P_5V_GR]  204.98 260.35 270 bottom
K26  G6K-2F-RF-T-5V-SPECIAL  [RL_G6K2FRT_8P_5V_GR]  188.47 246.63 270 bottom
K27  G6K-2F-RF-T-5V-SPECIAL  [RL_G6K2FRT_8P_5V_GR]  171.7 246.63 270 bottom
K28  UA2-5NJ-A-V3  [RL_NECUA2_5V_V3]  100.33 237.24 0 bottom
K29  G6K-2F-RF-T-5V-SPECIAL  [RL_G6K2FRT_8P_5V_GR]  171.7 260.35 270 bottom
K30  G6K-2F-RF-T-5V-SPECIAL  [RL_G6K2FRT_8P_5V_GR]  188.47 260.35 270 bottom
K31  EC2-5NJ-A  [RL_NECEC2_10P_5V]  196.34 276.86 90 bottom
K33  NC/UA2-5NJ-A-V3  [RL_NECUA2_5V_V3]  123.7 237.24 180 bottom
K34  EC2-5NJ-A  [RL_NECEC2_10P_5V]  180.34 293.37 90 bottom
K36  EC2-5NJ-A  [RL_NECEC2_10P_5V]  123.19 292.1 90 bottom
K37  EC2-5NJ-A  [RL_NECEC2_10P_5V]  163.83 293.37 90 bottom
K39  EC2-5NJ-A  [RL_NECEC2_10P_5V]  180.34 276.86 90 bottom
K40  EC2-5NJ-A  [RL_NECEC2_10P_5V]  196.34 293.37 90 bottom
K42  EC2-5NJ-A  [RL_NECEC2_10P_5V]  163.83 276.86 90 bottom
K43  G6K-2F-RF-T-5V-SPECIAL  [RL_G6K2FRT_8P_5V_GR]  269.49 276.1 180 bottom
LD902  LDG-2-S8  [LED_0805]  36.83 130.81 90 top
LOGO1  -  [LOGO_KT_KSMT]  538.48 154.94 0 top
LOGO2  LOGO_HX_Himax  [LOGO_HX_HIMAX]  518.16 138.43 0 top
LQFP176-20X20-P0.4  REF-CODE-CHIP  [CHIP_CODE]  559.05 282.19 0 top
NOREF  -  []  371.48 241.11 0 top
NOREF#2  -  []  330.49 223.52 90 top
NOREF#3  -  []  124.39 214.79 0 top
NOREF#4  -  []  396.55 241.11 0 top
NOREF#5  -  []  218.16 177.06 0 top
NOREF#6  -  []  409.43 139.89 0 top
NOREF#7  -  []  298.13 274.06 0 top
NOREF#8  -  []  254.29 205.56 90 top
NOREF#9  -  []  412.88 139.89 0 top
NOREF#10  -  []  390.53 146.88 0 top
NOREF#11  -  []  313.94 286.96 90 top
NOREF#12  -  []  252.51 204.35 90 top
NOREF#13  -  []  331.94 205.86 90 top
NOREF#14  -  []  453.88 230.2 0 top
NOREF#15  -  []  284.77 146.93 90 top
NOREF#16  -  []  184.47 219.75 90 top
NOREF#17  -  []  379.52 188.15 0 top
NOREF#18  -  []  409.74 146.88 0 top
NOREF#19  -  []  208.98 264.1 90 top
NOREF#20  -  []  451.64 179.06 0 top
NOREF#21  -  []  289.29 296.86 0 top
NOREF#22  -  []  247.57 264.65 90 top
NOREF#23  -  []  396.55 273.11 0 top
NOREF#24  -  []  327.25 265.55 0 top
NOREF#25  -  []  392.24 193.43 0 top
NOREF#26  -  []  385.19 297.12 0 top
NOREF#27  -  []  165.8 144.78 90 top
NOREF#28  -  []  262.04 164.72 0 top
NOREF#29  -  []  201.49 146.18 90 top
NOREF#30  -  []  188.08 291.65 90 top
NOREF#31  -  []  330.74 164.72 0 top
NOREF#32  -  []  310.43 253.37 90 top
NOREF#33  -  []  250.73 205.56 90 top
NOREF#34  -  []  373.68 249.11 0 top
NOREF#35  -  []  224.65 271.67 0 top
NOREF#36  -  []  228.36 262.16 45 top
NOREF#37  -  []  239.33 236.03 90 top
NOREF#38  -  []  318.3 163.52 90 top
NOREF#39  -  []  279.7 155.38 0 top
NOREF#40  -  []  250.17 163.82 90 top
NOREF#41  -  []  192.57 201.79 90 top
NOREF#42  -  []  339.33 265.55 0 top
NOREF#43  -  []  230.43 253.37 90 top
NOREF#44  -  []  119.95 187.53 0 top
NOREF#45  -  []  247.25 205.56 90 top
NOREF#46  -  []  373.87 171.39 0 top
NOREF#47  -  []  415.1 163.64 0 top
NOREF#48  -  []  465.45 276.41 90 top
NOREF#49  -  []  330.17 223.82 90 top
NOREF#50  -  []  259.97 264.35 90 top
NOREF#51  -  []  168.13 159.1 90 top
NOREF#52  -  []  192.57 174.36 90 top
NOREF#53  -  []  256.45 224.74 0 top
NOREF#54  -  []  375.73 194.78 90 top
NOREF#55  -  []  184.47 192.32 90 top
NOREF#56  -  []  108.27 178.64 0 top
NOREF#57  -  []  381.74 265.11 0 top
NOREF#58  -  []  229.51 249.2 0 top
NOREF#59  -  []  254.29 265.56 90 top
NOREF#60  -  []  327.25 265.56 0 top
NOREF#61  -  []  272.25 182.96 0 top
NOREF#62  -  []  413.71 148.15 90 top
NOREF#63  -  []  175.7 135.17 90 top
NOREF#64  -  []  201.23 204.09 90 top
NOREF#65  -  []  383.01 139.89 0 top
NOREF#66  -  []  175.7 218.65 90 top
NOREF#67  -  []  118.33 286.94 90 top
NOREF#68  -  []  338.2 246.67 0 top
NOREF#69  -  []  209.49 155.13 90 top
NOREF#70  -  []  120.21 178.64 0 top
NOREF#71  -  []  184.47 217.55 90 top
NOREF#72  -  []  270.04 280.1 0 top
NOREF#73  -  []  257.9 246.35 90 top
NOREF#74  -  []  320.42 131.64 0 top
NOREF#75  -  []  384.36 131.89 0 top
NOREF#76  -  []  303.56 185.29 90 top
NOREF#77  -  []  194.09 255.9 90 top
NOREF#78  -  []  93.76 290.38 90 top
NOREF#79  -  []  406.44 154.88 0 top
NOREF#80  -  []  392.24 194.78 90 top
NOREF#81  -  []  463.61 222.58 0 top
NOREF#82  -  []  309.21 193.37 0 top
NOREF#83  -  []  381.2 290.39 90 top
NOREF#84  -  []  352.25 184.86 90 top
NOREF#85  -  []  352.25 182.32 90 top
NOREF#86  -  []  324.65 288.86 0 top
NOREF#87  -  []  107.02 171.57 0 top
NOREF#88  -  []  309.51 187.93 0 top
NOREF#89  -  []  232.25 211.67 90 top
NOREF#90  -  []  394.05 255.47 0 top
NOREF#91  -  []  453.88 186.77 0 top
NOREF#92  -  []  308.14 296.86 0 top
NOREF#93  -  []  271.04 245.5 0 top
NOREF#94  -  []  246.67 288.16 90 top
NOREF#95  -  []  175.7 250.38 90 top
NOREF#96  -  []  468.85 259.9 90 top
NOREF#97  -  []  254.29 205.55 0 top
NOREF#98  -  []  218.13 214.06 90 top
NOREF#99  -  []  251.94 265.86 90 top
NOREF#100  -  []  167.7 145.93 0 top
NOREF#101  -  []  397.8 163.09 90 top
NOREF#102  -  []  411.99 161.74 90 top
NOREF#103  -  []  106.76 222.88 0 top
NOREF#104  -  []  511.59 276.41 90 top
NOREF#105  -  []  390.69 273.11 0 top
NOREF#106  -  []  199.33 226.57 0 top
NOREF#107  -  []  310.73 249.2 0 top
NOREF#108  -  []  334.61 205.86 90 top
NOREF#109  -  []  367.13 271.21 0 top
NOREF#110  -  []  327.57 204.65 90 top
NOREF#111  -  []  419.9 154.88 0 top
NOREF#112  -  []  409.17 281.37 0 top
NOREF#113  -  []  398.65 265.37 0 top
NOREF#114  -  []  175.8 228.97 90 top
NOREF#115  -  []  343.31 224.72 0 top
NOREF#116  -  []  272.24 184.86 90 top
NOREF#117  -  []  392.47 240.66 90 top
NOREF#118  -  []  465.81 222.58 0 top
NOREF#119  -  []  380.59 222.95 0 top
NOREF#120  -  []  194.09 214.75 90 top
NOREF#121  -  []  251.22 253.63 0 top
NOREF#122  -  []  303.84 288.86 0 top
NOREF#123  -  []  201.23 192.32 90 top
NOREF#124  -  []  388.35 217.36 0 top
NOREF#125  -  []  124.1 238.84 0 top
NOREF#126  -  []  107.02 166.42 90 top
NOREF#127  -  []  122.44 171.1 0 top
NOREF#128  -  []  166.06 203.01 90 top
NOREF#129  -  []  199.33 185.42 0 top
NOREF#130  -  []  459.28 227 90 top
NOREF#131  -  []  286.55 288.31 90 top
NOREF#132  -  []  392.24 196.98 90 top
NOREF#133  -  []  343.63 225.04 90 top
NOREF#134  -  []  388.43 163.64 0 top
NOREF#135  -  []  104.18 191.95 90 top
NOREF#136  -  []  343.83 171.63 90 top
NOREF#137  -  []  229.51 187.93 0 top
NOREF#138  -  []  343.31 164.74 0 top
NOREF#139  -  []  124.64 171.1 0 top
NOREF#140  -  []  381.74 232.85 0 top
NOREF#141  -  []  352.25 244.86 90 top
NOREF#142  -  []  424.55 146.88 90 top
NOREF#143  -  []  317.83 197.63 0 top
NOREF#144  -  []  167.7 149.48 90 top
NOREF#145  -  []  392.66 192.88 90 top
NOREF#146  -  []  300.01 288.41 90 top
NOREF#147  -  []  407.67 129.99 90 top
NOREF#148  -  []  317.05 288.86 0 top
NOREF#149  -  []  317.98 225.04 90 top
NOREF#150  -  []  328.96 224.74 0 top
NOREF#151  -  []  230.43 247.61 0 top
NOREF#152  -  []  337.9 246.35 90 top
NOREF#153  -  []  271.04 189.18 0 top
NOREF#154  -  []  184.47 233.47 90 top
NOREF#155  -  []  483.04 239.09 0 top
NOREF#156  -  []  328.96 164.72 0 top
NOREF#157  -  []  331.54 192.73 90 top
NOREF#158  -  []  272.55 245.18 0 top
NOREF#159  -  []  251.86 252.43 90 top
NOREF#160  -  []  381.2 242.38 90 top
NOREF#161  -  []  333.4 265.56 90 top
NOREF#162  -  []  175.7 164.3 90 top
NOREF#163  -  []  219.76 297.18 0 top
NOREF#164  -  []  224.65 211.67 0 top
NOREF#165  -  []  192.47 202.99 90 top
NOREF#166  -  []  465.45 292.92 90 top
NOREF#167  -  []  226.83 269.63 90 top
NOREF#168  -  []  318.32 131.64 0 top
NOREF#169  -  []  118.96 174.04 90 top
NOREF#170  -  []  167.7 178.86 90 top
NOREF#171  -  []  111.54 287.84 90 top
NOREF#172  -  []  408.63 242.38 90 top
NOREF#173  -  []  200.98 260.9 90 top
NOREF#174  -  []  415.1 163.64 0 top
NOREF#175  -  []  182.57 226.57 0 top
NOREF#176  -  []  391.8 209.36 0 top
NOREF#177  -  []  182.57 212.85 0 top
NOREF#178  -  []  462.06 274.77 90 top
NOREF#179  -  []  518.38 276.41 90 top
NOREF#180  -  []  501.87 273.87 90 top
NOREF#181  -  []  310.43 188.88 90 top
NOREF#182  -  []  119.99 214.79 0 top
NOREF#183  -  []  407.77 255.47 0 top
NOREF#184  -  []  271.04 249.82 0 top
NOREF#185  -  []  83.77 247.51 90 top
NOREF#186  -  []  410.52 289.12 0 top
NOREF#187  -  []  192.57 215.25 90 top
NOREF#188  -  []  404.15 257.37 0 top
NOREF#189  -  []  332.83 265.86 90 top
NOREF#190  -  []  410.27 257.37 0 top
NOREF#191  -  []  385.19 257.11 0 top
NOREF#192  -  []  262.04 164.74 0 top
NOREF#193  -  []  475.04 195.66 0 top
NOREF#194  -  []  378.33 241.11 90 top
NOREF#195  -  []  310.43 247.61 90 top
NOREF#196  -  []  167.7 241.43 0 top
NOREF#197  -  []  272.25 182.32 90 top
NOREF#198  -  []  395.07 129.99 0 top
NOREF#199  -  []  417.7 154.88 0 top
NOREF#200  -  []  405.5 241.11 90 top
NOREF#201  -  []  448.94 292.92 90 top
NOREF#202  -  []  182.57 144.78 0 top
NOREF#203  -  []  115.87 175.44 90 top
NOREF#204  -  []  319.33 236.03 0 top
NOREF#205  -  []  166.06 257.62 90 top
NOREF#206  -  []  406.65 223.21 90 top
NOREF#207  -  []  201.23 219.75 90 top
NOREF#208  -  []  327.7 131.19 90 top
NOREF#209  -  []  209.33 242.68 90 top
NOREF#210  -  []  479.44 239.09 0 top
NOREF#211  -  []  334.29 205.56 0 top
NOREF#212  -  []  396.03 180.15 0 top
NOREF#213  -  []  258.61 131.69 90 top
NOREF#214  -  []  471.21 168.33 90 top
NOREF#215  -  []  184.47 215.35 90 top
NOREF#216  -  []  375.73 199.18 90 top
NOREF#217  -  []  248.33 247.93 0 top
NOREF#218  -  []  392.04 257.11 90 top
NOREF#219  -  []  411.52 146.33 90 top
NOREF#220  -  []  448.94 273.87 90 top
NOREF#221  -  []  390.94 257.16 90 top
NOREF#222  -  []  248.33 187.93 0 top
NOREF#223  -  []  253.72 204.65 90 top
NOREF#224  -  []  463.11 230.2 0 top
NOREF#225  -  []  238.45 197.01 0 top
NOREF#226  -  []  306.71 152.34 0 top
NOREF#227  -  []  471.21 211.76 90 top
NOREF#228  -  []  337.9 186.99 0 top
NOREF#229  -  []  247.25 264.35 90 top
NOREF#230  -  []  240.83 194.63 0 top
NOREF#231  -  []  252.51 265.56 90 top
NOREF#232  -  []  98.53 238.84 0 top
NOREF#233  -  []  175.7 150.58 90 top
NOREF#234  -  []  272.25 183.59 90 top
NOREF#235  -  []  468.01 171.53 0 top
NOREF#236  -  []  199.33 240.28 0 top
NOREF#237  -  []  352.25 242.32 90 top
NOREF#238  -  []  381.2 226.12 90 top
NOREF#239  -  []  192.47 164.3 90 top
NOREF#240  -  []  352.25 241.05 90 top
NOREF#241  -  []  518.38 259.9 90 top
NOREF#242  -  []  118.74 215.34 0 top
NOREF#243  -  []  385.19 289.12 0 top
NOREF#244  -  []  246.23 233.13 0 top
NOREF#245  -  []  167.7 173.11 90 top
NOREF#246  -  []  167.7 255.15 0 top
NOREF#247  -  []  184.47 204.09 90 top
NOREF#248  -  []  395.2 249.11 0 top
NOREF#249  -  []  237.2 296.61 0 top
NOREF#250  -  []  405.93 240.66 90 top
NOREF#251  -  []  250.17 225.04 90 top
NOREF#252  -  []  411.26 179.7 90 top
NOREF#253  -  []  237.98 225.04 90 top
NOREF#254  -  []  384.17 163.39 90 top
NOREF#255  -  []  518.38 273.87 90 top
NOREF#256  -  []  295.96 188.49 0 top
NOREF#257  -  []  177.33 187.32 90 top
NOREF#258  -  []  396.55 225.11 0 top
NOREF#259  -  []  235.85 296.61 0 top
NOREF#260  -  []  314.71 142.44 90 top
NOREF#261  -  []  184.47 200.54 90 top
NOREF#262  -  []  412.62 297.12 0 top
NOREF#263  -  []  463.61 171.53 0 top
NOREF#264  -  []  168.13 213.45 90 top
NOREF#265  -  []  459.28 183.57 90 top
NOREF#266  -  []  369.38 257.11 0 top
NOREF#267  -  []  403.41 209.61 0 top
NOREF#268  -  []  453.88 214.96 0 top
NOREF#269  -  []  250.49 163.52 90 top
NOREF#270  -  []  352.25 182.96 0 top
NOREF#271  -  []  96.58 195.15 0 top
NOREF#272  -  []  272.55 182.64 0 top
NOREF#273  -  []  400.85 249.11 0 top
NOREF#274  -  []  408.02 287.22 0 top
NOREF#275  -  []  330.74 224.72 0 top
NOREF#276  -  []  223.56 233.86 90 top
NOREF#277  -  []  342.36 165.04 90 top
NOREF#278  -  []  450.03 210.36 0 top
NOREF#279  -  []  220.36 188.49 0 top
NOREF#280  -  []  240.83 254.63 0 top
NOREF#281  -  []  230.43 247.61 90 top
NOREF#282  -  []  392.47 224.4 90 top
NOREF#283  -  []  352.24 244.86 90 top
NOREF#284  -  []  230.43 193.37 90 top
NOREF#285  -  []  393.19 271.21 90 top
NOREF#286  -  []  259.33 205.56 0 top
NOREF#287  -  []  177.33 146.68 90 top
NOREF#288  -  []  300.36 248.49 0 top
NOREF#289  -  []  320.94 151.63 90 top
NOREF#290  -  []  184.47 159.65 90 top
NOREF#291  -  []  411.99 178.25 90 top
NOREF#292  -  []  229.51 183.41 0 top
NOREF#293  -  []  254.29 265.56 0 top
NOREF#294  -  []  230.83 164.63 0 top
NOREF#295  -  []  383.73 195.88 90 top
NOREF#296  -  []  262.36 165.04 90 top
NOREF#297  -  []  106.18 160.58 90 top
NOREF#298  -  []  182.57 171.96 0 top
NOREF#299  -  []  96.58 195.15 0 top
NOREF#300  -  []  230.41 246.34 90 top
NOREF#301  -  []  165.8 199.39 0 top
NOREF#302  -  []  237.83 257.63 0 top
NOREF#303  -  []  184.47 260.9 90 top
NOREF#304  -  []  394.05 223.21 0 top
NOREF#305  -  []  192.47 218.65 90 top
NOREF#306  -  []  371.73 273.11 0 top
NOREF#307  -  []  463.61 179.15 0 top
NOREF#308  -  []  306.83 209.63 90 top
NOREF#309  -  []  369.38 241.11 0 top
NOREF#310  -  []  331.05 264.65 90 top
NOREF#311  -  []  371.73 281.11 0 top
NOREF#312  -  []  201.23 247.18 90 top
NOREF#313  -  []  184.47 145.93 90 top
NOREF#314  -  []  451.68 186.77 0 top
NOREF#315  -  []  395.67 133.16 90 top
NOREF#316  -  []  392.47 224.3 90 top
NOREF#317  -  []  209.23 230.17 90 top
NOREF#318  -  []  229.21 243.09 0 top
NOREF#319  -  []  343.63 165.04 90 top
NOREF#320  -  []  395.2 233.11 0 top
NOREF#321  -  []  376.23 209.11 0 top
NOREF#322  -  []  387.08 154.88 0 top
NOREF#323  -  []  192.47 205.19 90 top
NOREF#324  -  []  241.82 167.13 90 top
NOREF#325  -  []  329.6 164.74 90 top
NOREF#326  -  []  115.61 211.51 90 top
NOREF#327  -  []  408.63 274.64 90 top
NOREF#328  -  []  250.23 132.14 0 top
NOREF#329  -  []  379.73 271.21 90 top
NOREF#330  -  []  460.93 166.93 90 top
NOREF#331  -  []  420.15 131.34 90 top
NOREF#332  -  []  310.73 247.93 0 top
NOREF#333  -  []  314.33 228.13 90 top
NOREF#334  -  []  405.93 288.57 90 top
NOREF#335  -  []  106.76 210.11 90 top
NOREF#336  -  []  461.86 230.75 0 top
NOREF#337  -  []  66.26 273.87 90 top
NOREF#338  -  []  393.74 131.34 90 top
NOREF#339  -  []  451.68 230.2 0 top
NOREF#340  -  []  112.67 171.02 0 top
NOREF#341  -  []  277.17 288.86 0 top
NOREF#342  -  []  410.52 289.12 0 top
NOREF#343  -  []  302.11 142.44 0 top
NOREF#344  -  []  167.7 219.75 90 top
NOREF#345  -  []  254.29 265.55 0 top
NOREF#346  -  []  128.21 178.64 0 top
NOREF#347  -  []  192.57 160.9 90 top
NOREF#348  -  []  182.57 144.78 90 top
NOREF#349  -  []  342.04 224.72 0 top
NOREF#350  -  []  411.26 163.19 90 top
NOREF#351  -  []  310.43 186.34 90 top
NOREF#352  -  []  406.19 188.15 0 top
NOREF#353  -  []  177.33 228.47 90 top
NOREF#354  -  []  272.24 249.18 90 top
NOREF#355  -  []  310.41 247.61 90 top
NOREF#356  -  []  201.23 187.92 90 top
NOREF#357  -  []  182.57 254 0 top
NOREF#358  -  []  259.84 133.29 90 top
NOREF#359  -  []  284.79 272.65 90 top
NOREF#360  -  []  177.33 255.9 90 top
NOREF#361  -  []  383.09 273.11 0 top
NOREF#362  -  []  248.96 164.74 0 top
NOREF#363  -  []  332.61 296.86 0 top
NOREF#364  -  []  383.09 224.85 0 top
NOREF#365  -  []  119.95 222.33 0 top
NOREF#366  -  []  209.59 160.9 90 top
NOREF#367  -  []  308.91 139.64 0 top
NOREF#368  -  []  248.96 224.74 0 top
NOREF#369  -  []  167.7 178.86 90 top
NOREF#370  -  []  241.82 227.13 90 top
NOREF#371  -  []  251.62 205.56 90 top
NOREF#372  -  []  250.73 265.56 0 top
NOREF#373  -  []  348.28 296.86 0 top
NOREF#374  -  []  413.71 178.82 0 top
NOREF#375  -  []  399.07 208.91 90 top
NOREF#376  -  []  404.15 241.11 0 top
NOREF#377  -  []  272.24 189.18 90 top
NOREF#378  -  []  184.47 201.89 90 top
NOREF#379  -  []  310.43 188.88 90 top
NOREF#380  -  []  279.27 288.86 0 top
NOREF#381  -  []  417.2 163.64 0 top
NOREF#382  -  []  410.52 241.11 0 top
NOREF#383  -  []  254.61 204.65 90 top
NOREF#384  -  []  211.11 173.86 90 top
NOREF#385  -  []  344.37 128.27 90 top
NOREF#386  -  []  272.8 157.28 0 top
NOREF#387  -  []  328.42 129.74 90 top
NOREF#388  -  []  352.24 182.32 90 top
NOREF#389  -  []  167.7 256.5 90 top
NOREF#390  -  []  472.86 166.93 90 top
NOREF#391  -  []  262.68 163.52 90 top
NOREF#392  -  []  309.51 186.66 0 top
NOREF#393  -  []  310.43 246.34 90 top
NOREF#394  -  []  342.04 164.74 0 top
NOREF#395  -  []  376.98 257.11 0 top
NOREF#396  -  []  366.88 239.21 0 top
NOREF#397  -  []  229.21 193.37 0 top
NOREF#398  -  []  184.47 247.18 90 top
NOREF#399  -  []  451.68 186.77 0 top
NOREF#400  -  []  555.66 300.54 90 top
NOREF#401  -  []  167.7 260.9 90 top
NOREF#402  -  []  201.66 186.02 90 top
NOREF#403  -  []  376.98 241.11 0 top
NOREF#404  -  []  419.9 272.82 90 top
NOREF#405  -  []  167.7 163.2 90 top
NOREF#406  -  []  108.01 195.15 0 top
NOREF#407  -  []  230.73 249.2 0 top
NOREF#408  -  []  400.79 154.88 0 top
NOREF#409  -  []  184.47 255.15 0 top
NOREF#410  -  []  411.01 209.61 0 top
NOREF#411  -  []  127.84 167.9 90 top
NOREF#412  -  []  223.15 271.32 90 top
NOREF#413  -  []  423.61 184.62 90 top
NOREF#414  -  []  419.4 171.64 0 top
NOREF#415  -  []  306.71 144.34 0 top
NOREF#416  -  []  167.7 132.72 0 top
NOREF#417  -  []  286.81 272.1 0 top
NOREF#418  -  []  418.12 273.37 0 top
NOREF#419  -  []  250.73 265.55 0 top
NOREF#420  -  []  339.97 204.35 90 top
NOREF#421  -  []  192.47 236.67 90 top
NOREF#422  -  []  249.28 163.82 90 top
NOREF#423  -  []  248.96 224.72 0 top
NOREF#424  -  []  237.98 163.82 90 top
NOREF#425  -  []  120.21 178.64 0 top
NOREF#426  -  []  380.59 271.21 0 top
NOREF#427  -  []  313.22 288.41 90 top
NOREF#428  -  []  263.2 232.26 90 top
NOREF#429  -  []  412.62 289.12 0 top
NOREF#430  -  []  342.36 163.82 90 top
NOREF#431  -  []  209.49 148.63 90 top
NOREF#432  -  []  201.23 233.47 90 top
NOREF#433  -  []  339.33 204.35 90 top
NOREF#434  -  []  201.23 206.29 90 top
NOREF#435  -  []  167.7 214 90 top
NOREF#436  -  []  471.21 219.38 90 top
NOREF#437  -  []  182.57 254 90 top
NOREF#438  -  []  112.41 195.15 0 top
NOREF#439  -  []  470.71 227 90 top
NOREF#440  -  []  263.31 164.74 0 top
NOREF#441  -  []  317.83 257.63 0 top
NOREF#442  -  []  317.57 269.63 90 top
NOREF#443  -  []  384.08 209.16 90 top
NOREF#444  -  []  101.82 273.87 90 top
NOREF#445  -  []  463.11 230.2 0 top
NOREF#446  -  []  217.41 213.24 90 top
NOREF#447  -  []  390.69 224.85 0 top
NOREF#448  -  []  451.68 239.34 0 top
NOREF#449  -  []  273.09 288.41 90 top
NOREF#450  -  []  322.23 233.13 0 top
NOREF#451  -  []  192.47 222.95 90 top
NOREF#452  -  []  192.47 175.56 90 top
NOREF#453  -  []  201.49 163.2 90 top
NOREF#454  -  []  412.62 241.11 0 top
NOREF#455  -  []  309.51 189.2 0 top
NOREF#456  -  []  451.68 195.91 0 top
NOREF#457  -  []  274.67 286.96 0 top
NOREF#458  -  []  318.32 131.64 0 top
NOREF#459  -  []  327.7 131.09 90 top
NOREF#460  -  []  250.74 224.72 0 top
NOREF#461  -  []  230.43 188.88 90 top
NOREF#462  -  []  209.23 205.19 90 top
NOREF#463  -  []  369.63 289.12 0 top
NOREF#464  -  []  108.01 214.71 0 top
NOREF#465  -  []  175.7 141.67 90 top
NOREF#466  -  []  415.61 185.72 90 top
NOREF#467  -  []  250.74 224.74 0 top
NOREF#468  -  []  221.56 239.06 0 top
NOREF#469  -  []  301.56 239.06 0 top
NOREF#470  -  []  262.68 164.74 90 top
NOREF#471  -  []  381.86 129.99 0 top
NOREF#472  -  []  415.6 146.88 0 top
NOREF#473  -  []  247.25 265.55 0 top
NOREF#474  -  []  313.56 144.34 90 top
NOREF#475  -  []  209.49 175.56 90 top
NOREF#476  -  []  352.24 183.59 90 top
NOREF#477  -  []  275.28 290.13 90 top
NOREF#478  -  []  110.21 214.71 0 top
NOREF#479  -  []  387.39 232.85 0 top
NOREF#480  -  []  310.43 248.88 90 top
NOREF#481  -  []  478.57 277.31 90 top
NOREF#482  -  []  332.83 205.86 90 top
NOREF#483  -  []  35.83 132.61 0 top
NOREF#484  -  []  481.96 273.87 90 top
NOREF#485  -  []  375.22 180.15 0 top
NOREF#486  -  []  223.56 185.29 90 top
NOREF#487  -  []  398.65 249.11 0 top
NOREF#488  -  []  384.59 179.6 90 top
NOREF#489  -  []  377.23 257.16 90 top
NOREF#490  -  []  66.26 271.33 90 top
NOREF#491  -  []  263.95 164.74 90 top
NOREF#492  -  []  262.36 223.82 90 top
NOREF#493  -  []  396.55 289.12 0 top
NOREF#494  -  []  217.83 174.63 90 top
NOREF#495  -  []  329.28 223.82 90 top
NOREF#496  -  []  168.69 290.01 90 top
NOREF#497  -  []  175.8 187.82 90 top
NOREF#498  -  []  386.46 139.89 0 top
NOREF#499  -  []  329.28 163.82 90 top
NOREF#500  -  []  184.47 151.68 90 top
NOREF#501  -  []  269.94 135.19 0 top
NOREF#502  -  []  166.06 135.19 90 top
NOREF#503  -  []  260.6 286.96 90 top
NOREF#504  -  []  215.96 248.49 0 top
NOREF#505  -  []  230.41 188.88 90 top
NOREF#506  -  []  403.99 180.15 0 top
NOREF#507  -  []  420.88 129.99 90 top
NOREF#508  -  []  167.7 247.18 90 top
NOREF#509  -  []  247.25 265.56 90 top
NOREF#510  -  []  478.57 274.77 90 top
NOREF#511  -  []  396.55 273.11 0 top
NOREF#512  -  []  263.95 163.52 90 top
NOREF#513  -  []  372.72 161.49 0 top
NOREF#514  -  []  382.47 133.16 90 top
NOREF#515  -  []  94.93 190.55 0 top
NOREF#516  -  []  251.62 265.55 0 top
NOREF#517  -  []  249.15 296.86 0 top
NOREF#518  -  []  376.98 224.6 0 top
NOREF#519  -  []  387.8 210.63 90 top
NOREF#520  -  []  310.73 243.41 0 top
NOREF#521  -  []  201.49 151.93 90 top
NOREF#522  -  []  226.27 156.63 90 top
NOREF#523  -  []  332.51 265.55 0 top
NOREF#524  -  []  184.47 214 90 top
NOREF#525  -  []  127.3 235.64 90 top
NOREF#526  -  []  331.22 193.63 0 top
NOREF#527  -  []  263.63 163.82 90 top
NOREF#528  -  []  318.32 131.64 0 top
NOREF#529  -  []  167.7 227.72 90 top
NOREF#530  -  []  463.11 186.77 0 top
NOREF#531  -  []  118.99 166.5 90 top
NOREF#532  -  []  184.47 178.86 90 top
NOREF#533  -  []  210.86 228.47 90 top
NOREF#534  -  []  248 286.96 0 top
NOREF#535  -  []  383.09 241.11 0 top
NOREF#536  -  []  451.68 171.53 0 top
NOREF#537  -  []  334.29 264.35 90 top
NOREF#538  -  []  313.98 143.79 90 top
NOREF#539  -  []  252.51 265.56 0 top
NOREF#540  -  []  184.47 258.7 90 top
NOREF#541  -  []  234.33 168.13 90 top
NOREF#542  -  []  404.15 225.11 0 top
NOREF#543  -  []  305.94 296.86 0 top
NOREF#544  -  []  518.38 257.36 90 top
NOREF#545  -  []  382.82 180.15 0 top
NOREF#546  -  []  322.23 173.13 0 top
NOREF#547  -  []  397.8 179.7 90 top
NOREF#548  -  []  184.47 165.4 90 top
NOREF#549  -  []  184.89 199.99 90 top
NOREF#550  -  []  371.48 232.6 0 top
NOREF#551  -  []  377.32 188.15 0 top
NOREF#552  -  []  386.46 131.89 0 top
NOREF#553  -  []  285.02 288.91 90 top
NOREF#554  -  []  330.51 288.86 0 top
NOREF#555  -  []  400.85 297.12 0 top
NOREF#556  -  []  451.68 239.34 0 top
NOREF#557  -  []  417.7 146.88 0 top
NOREF#558  -  []  339.89 288.31 90 top
NOREF#559  -  []  241.6 296.61 0 top
NOREF#560  -  []  389.7 209.36 0 top
NOREF#561  -  []  229.51 186.66 0 top
NOREF#562  -  []  342.63 296.86 0 top
NOREF#563  -  []  410.78 131.89 0 top
NOREF#564  -  []  201.49 176.66 90 top
NOREF#565  -  []  329.85 224.72 0 top
NOREF#566  -  []  257.09 164.74 90 top
NOREF#567  -  []  248.96 164.72 0 top
NOREF#568  -  []  294.94 296.86 0 top
NOREF#569  -  []  310.43 187.61 0 top
NOREF#570  -  []  175.7 189.02 90 top
NOREF#571  -  []  107.02 179.19 0 top
NOREF#572  -  []  398.65 257.37 0 top
NOREF#573  -  []  341.63 173.83 90 top
NOREF#574  -  []  423.61 182.42 90 top
NOREF#575  -  []  378.75 240.56 90 top
NOREF#576  -  []  390.69 289.12 0 top
NOREF#577  -  []  249.85 224.72 0 top
NOREF#578  -  []  393.19 239.21 90 top
NOREF#579  -  []  449.99 217.9 0 top
NOREF#580  -  []  380.59 287.22 0 top
NOREF#581  -  []  182.82 189.04 90 top
NOREF#582  -  []  396.55 257.37 0 top
NOREF#583  -  []  312.21 131.64 0 top
NOREF#584  -  []  331.38 224.74 90 top
NOREF#585  -  []  393.19 222.95 90 top
NOREF#586  -  []  393.19 255.21 90 top
NOREF#587  -  []  175.7 222.95 90 top
NOREF#588  -  []  351.58 288.86 0 top
NOREF#589  -  []  201.49 178.86 90 top
NOREF#590  -  []  230.43 243.09 90 top
NOREF#591  -  []  263.83 231.63 90 top
NOREF#592  -  []  422.7 163.64 0 top
NOREF#593  -  []  167.7 219.75 90 top
NOREF#594  -  []  165.8 240.28 0 top
NOREF#595  -  []  118.7 222.88 0 top
NOREF#596  -  []  332.51 205.55 0 top
NOREF#597  -  []  277.17 288.86 0 top
NOREF#598  -  []  274.37 147.93 90 top
NOREF#599  -  []  229.21 248.88 0 top
NOREF#600  -  []  459.24 175.86 0 top
NOREF#601  -  []  352.55 249.5 0 top
NOREF#602  -  []  177.33 173.86 90 top
NOREF#603  -  []  201.23 192.32 90 top
NOREF#604  -  []  387.39 249.11 0 top
NOREF#605  -  []  310.73 253.69 0 top
NOREF#606  -  []  199.84 148.65 90 top
NOREF#607  -  []  352.24 241.05 90 top
NOREF#608  -  []  121.9 238.84 0 top
NOREF#609  -  []  352.24 242.32 90 top
NOREF#610  -  []  415.61 183.52 90 top
NOREF#611  -  []  410.84 163.64 90 top
NOREF#612  -  []  107.76 238.84 0 top
NOREF#613  -  []  253.4 265.56 90 top
NOREF#614  -  []  477.24 239.09 0 top
NOREF#615  -  []  386.53 181.42 90 top
NOREF#616  -  []  249.6 223.52 90 top
NOREF#617  -  []  272.25 245.5 0 top
NOREF#618  -  []  270.04 280.1 0 top
NOREF#619  -  []  376.23 209.11 0 top
NOREF#620  -  []  352.55 185.18 0 top
NOREF#621  -  []  175.8 133.97 90 top
NOREF#622  -  []  175.7 236.67 90 top
NOREF#623  -  []  98.78 195.15 0 top
NOREF#624  -  []  230.41 183.09 90 top
NOREF#625  -  []  201.49 159.65 90 top
NOREF#626  -  []  107.02 171.57 0 top
NOREF#627  -  []  337.09 223.52 90 top
NOREF#628  -  []  167.7 136.27 90 top
NOREF#629  -  []  299.59 288.86 90 top
NOREF#630  -  []  411.26 163.09 90 top
NOREF#631  -  []  167.7 147.28 90 top
NOREF#632  -  []  451.68 171.53 0 top
NOREF#633  -  []  115.19 128.27 0 top
NOREF#634  -  []  209.33 201.79 90 top
NOREF#635  -  []  368.03 249.11 0 top
NOREF#636  -  []  272.25 249.18 90 top
NOREF#637  -  []  216.96 180.71 0 top
NOREF#638  -  []  115.61 219.13 90 top
NOREF#639  -  []  368.03 232.6 0 top
NOREF#640  -  []  199.33 199.39 0 top
NOREF#641  -  []  309.21 243.09 0 top
NOREF#642  -  []  252.51 265.55 0 top
NOREF#643  -  []  331.05 265.86 90 top
NOREF#644  -  []  352.25 189.18 90 top
NOREF#645  -  []  201.49 165.4 90 top
NOREF#646  -  []  257.09 224.74 90 top
NOREF#647  -  []  317.57 209.63 90 top
NOREF#648  -  []  192.47 232.37 90 top
NOREF#649  -  []  103.93 235.64 0 top
NOREF#650  -  []  222.11 252.14 0 top
NOREF#651  -  []  247.57 264.65 90 top
NOREF#652  -  []  343.63 223.82 90 top
NOREF#653  -  []  310.73 253.69 0 top
NOREF#654  -  []  415.61 181.32 90 top
NOREF#655  -  []  251.62 265.56 0 top
NOREF#656  -  []  290.11 280.1 0 top
NOREF#657  -  []  327.15 286.96 90 top
NOREF#658  -  []  167.7 138.47 90 top
NOREF#659  -  []  215.96 188.49 0 top
NOREF#660  -  []  471.21 168.33 0 top
NOREF#661  -  []  473.79 234.49 90 top
NOREF#662  -  []  450.03 210.36 0 top
NOREF#663  -  []  396.03 163.64 0 top
NOREF#664  -  []  330.51 288.86 0 top
NOREF#665  -  []  352.24 243.59 90 top
NOREF#666  -  []  249.6 224.74 90 top
NOREF#667  -  []  386.53 148.15 90 top
NOREF#668  -  []  379 272.56 90 top
NOREF#669  -  []  310.43 254.01 0 top
NOREF#670  -  []  343.98 288.86 0 top
NOREF#671  -  []  167.7 214 0 top
NOREF#672  -  []  271.31 288.86 0 top
NOREF#673  -  []  482.64 192.46 90 top
NOREF#674  -  []  473.6 162.62 90 top
NOREF#675  -  []  310.43 193.37 90 top
NOREF#676  -  []  319.33 243.63 90 top
NOREF#677  -  []  326.43 288.41 90 top
NOREF#678  -  []  465.81 171.53 0 top
NOREF#679  -  []  399.99 181.42 90 top
NOREF#680  -  []  184.47 255.15 90 top
NOREF#681  -  []  376.23 209.11 0 top
NOREF#682  -  []  373.93 297.12 0 top
NOREF#683  -  []  333.72 204.65 90 top
NOREF#684  -  []  310.43 243.09 0 top
NOREF#685  -  []  468.01 214.96 0 top
NOREF#686  -  []  242.23 173.13 90 top
NOREF#687  -  []  167.7 186.57 0 top
NOREF#688  -  []  465.45 290.38 90 top
NOREF#689  -  []  120.24 171.1 0 top
NOREF#690  -  []  387.08 188.15 0 top
NOREF#691  -  []  298.16 177.06 0 top
NOREF#692  -  []  167.7 206.29 90 top
NOREF#693  -  []  404.4 257.42 90 top
NOREF#694  -  []  237.66 164.74 0 top
NOREF#695  -  []  331.62 205.55 0 top
NOREF#696  -  []  251.62 204.35 90 top
